# EAGLE board variable (EAGLE 6.5.0)
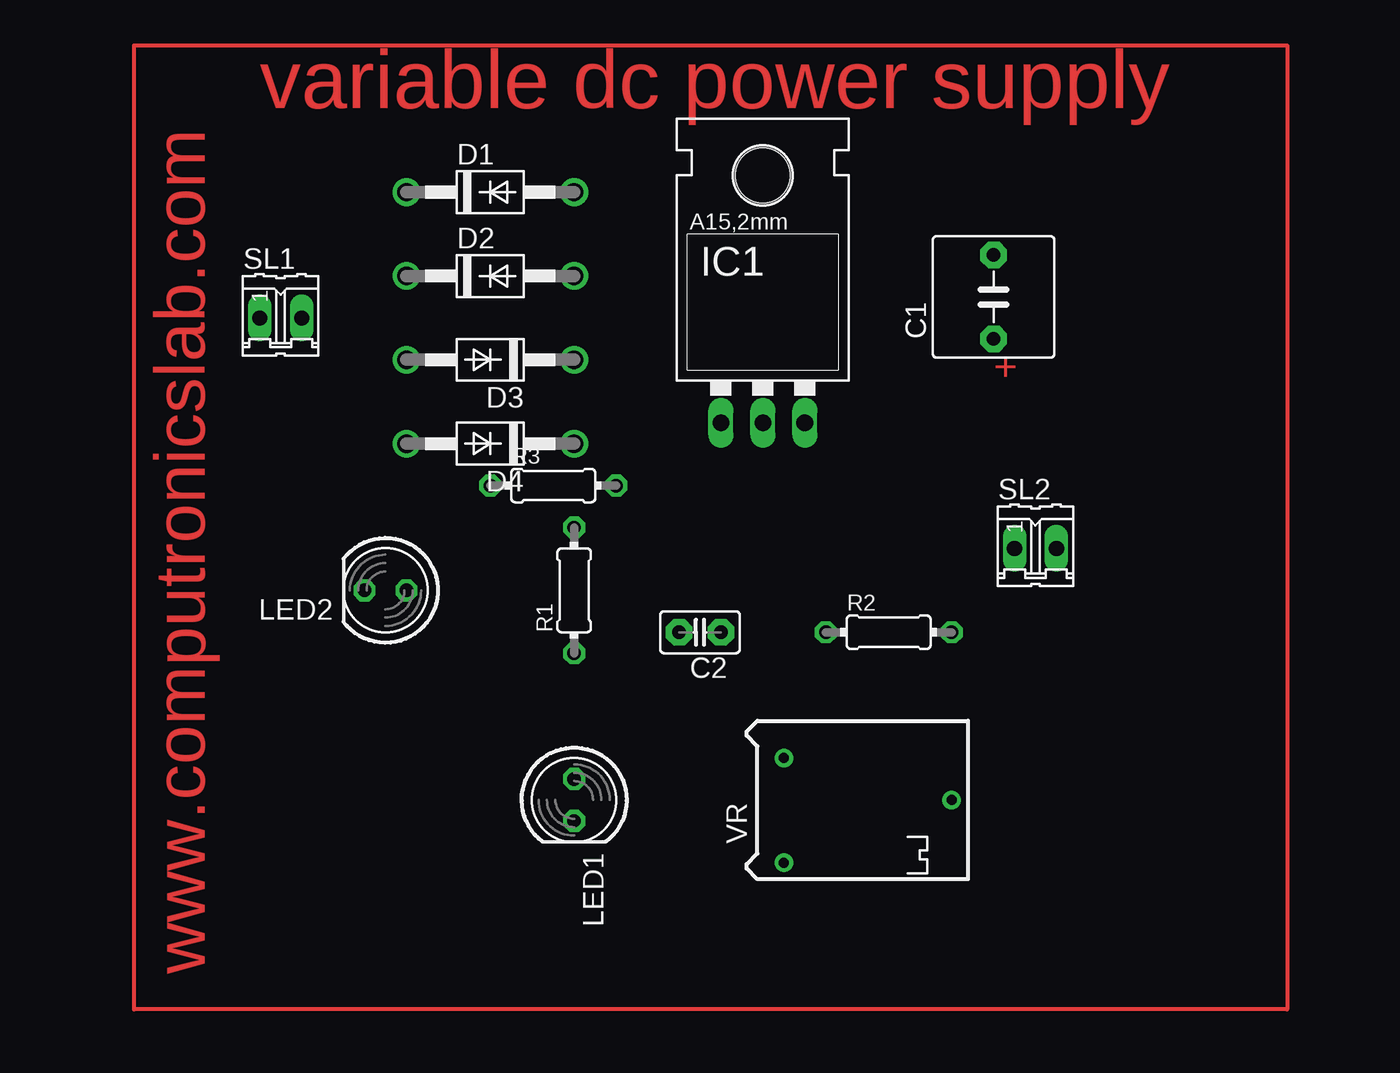
[diagram p0: board, top side]
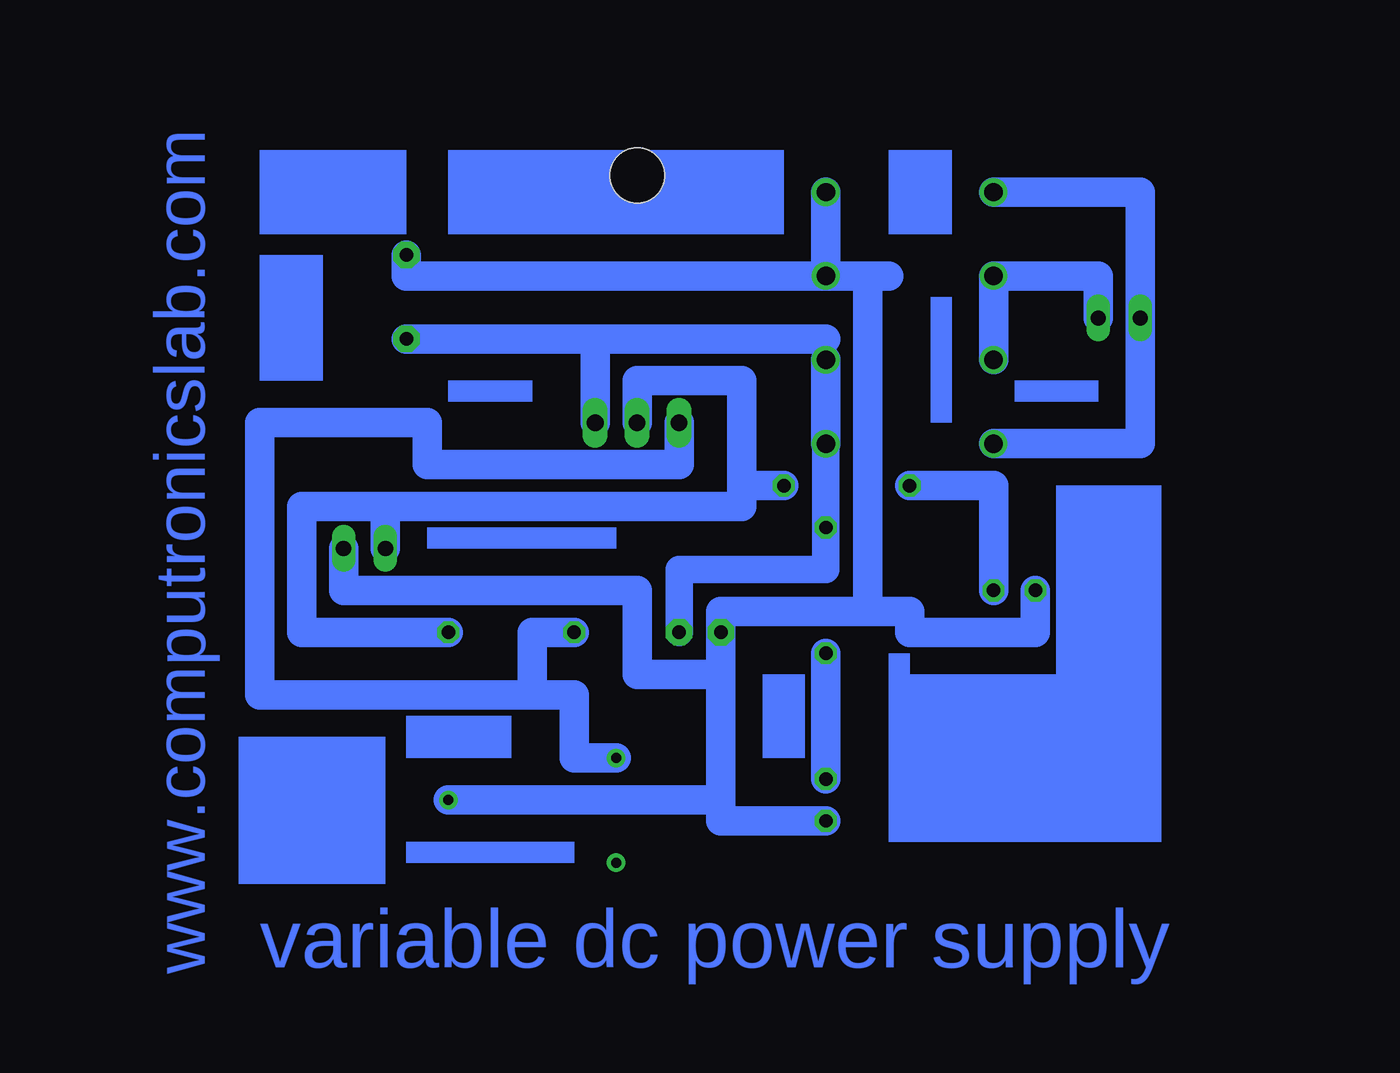
[diagram p1: board, bottom side, seen from below]

No outline drawn. Coordinates in mm, seen from the top.
Copper layers (1*16): Top 0.035mm / dielectric 1.5mm / Bottom 0.035mm
Design rules "default": minimum track width 10mil, minimum drill 24mil, track to track 8mil, track to pad 8mil, pad to pad 8mil, via to via 8mil, smd to smd 8mil, copper to edge 40mil, drill to drill 8mil, minimum pad ring 10mil, minimum via ring 8mil, stop-mask expansion 4mil, vias tented up to drill 0mil, thermal gap 10mil

## Footprints (pad centres in the part's own frame; a part is rotated, then mirrored left to right if it is on the bottom)
C5B7.2 = drill 0.813 pad 1.6 octagon: 1 -2.54,0; 2 2.54,0
C2.5-2 = drill 0.813 pad 1.6 octagon: 1 -1.27,0; 2 1.27,0
DO41-10 = drill 1.118: A 5.08,0; C -5.08,0
317TL = drill 1.016 long: 1 -2.54,-3.81; 2 0,-3.81; 3 2.54,-3.81 | hole 3.302: 0,11.176
LED5MM = drill 0.813 octagon: A -1.27,0; K 1.27,0
0204/7 = drill 0.813 octagon: 1 -3.81,0; 2 3.81,0
02P = drill 0.914 long: 1 -1.27,0; 2 1.27,0
RTRIM64P = drill 0.61: 1 -2.54,-3.81; 2 7.62,0; 3 -2.54,2.54

## Placement (x,y rotation side)
C1  2200uf  [C5B7.2]  48.26,50.8 90 top
C2  0.1uf  [C2.5-2]  30.48,30.48 180 top
D1  1N4007  [DO41-10]  17.78,57.15 0 top
D2  1N4007  [DO41-10]  17.78,52.07 0 top
D3  1N4007  [DO41-10]  17.78,46.99 180 top
D4  1N4007  [DO41-10]  17.78,41.91 180 top
IC1  LM317  [317TL]  34.29,46.99 0 top
LED1  5mm  [LED5MM]  22.86,20.32 270 top
LED2  5mm  [LED5MM]  11.43,33.02 180 top
R1  1K  [0204/7]  22.86,33.02 90 top
R2  180E  [0204/7]  41.91,30.48 0 top
R3  220E  [0204/7]  21.59,39.37 0 top
SL1  transformer  [02P]  5.08,49.53 0 top
SL2  output  [02P]  50.8,35.56 0 top
VR  4.7K  [RTRIM64P]  38.1,20.32 0 top

## Library data of the parts
C1 C2 = capacitor-wima
D1-D4 = diode
IC1 = v-reg
LED1 LED2 = led
R1-R3 = eagle-ltspice; SPICEMODEL: NONE; SPICEPREFIX: R
SL1 SL2 = con-amp-quick; OC_FARNELL: unknown; OC_NEWARK: unknown
VR = resistor

## Nets
N$1: LED1.A R1.1
N$2: D1.C D4.A SL1.1
N$3: D2.C D3.A SL1.2
N$4: C1.1 C2.1 D3.C D4.C IC1.3 R1.2
N$6: IC1.1 R2.1 VR.3
N$7: LED2.A R3.1
N$9: IC1.2 R2.2 R3.2 SL2.1
N$10: C1.2 C2.2 D1.A D2.A LED1.K LED2.K SL2.2 VR.2

## Tracks (layer width: path | path; a pad name or v marks a point on that pad's centre or on a via)
N$1
  Bottom 1.778: R1.1 LED1.A
N$2
  Bottom 1.778: D1.C 3.81,57.15 SL1.1 3.81,41.91 D4.A
N$3
  Bottom 1.778: SL1.2 6.35,52.07 D2.C D3.A
N$4
  Bottom 0.254: D3.C 22.86,48.26
  Bottom 1.676: D4.C R1.2 22.86,34.29 31.75,34.29 C2.1
  Bottom 1.778: C1.1 36.83,48.26 | D4.C D3.C | 36.83,48.26 IC1.3 | 22.86,48.26 36.83,48.26
N$5
  Top 0.254: -3.81,66.04 66.04,66.04 66.04,7.62 -3.81,7.62 -3.81,66.04
N$6
  Bottom 1.778: VR.3 38.1,22.86 38.1,26.67 40.64,26.67 | R2.1 40.64,30.48 40.64,26.67 | IC1.1 31.75,40.64 46.99,40.64 46.99,43.18 57.15,43.18 57.15,26.67 40.64,26.67
N$7
  Bottom 1.778: LED2.A 12.7,39.37 R3.1
N$9
  Bottom 1.778: R2.2 54.61,30.48 54.61,38.1 49.53,38.1 | SL2.1 49.53,38.1 | IC1.2 34.29,45.72 27.94,45.72 27.94,39.37 | 27.94,39.37 27.94,38.1 49.53,38.1 | 27.94,39.37 R3.2
N$10
  Bottom 1.778: C1.2 48.26,52.07 D2.A | D2.A D1.A | VR.2 29.21,20.32 | SL2.2 52.07,33.02 34.29,33.02 34.29,27.94 29.21,27.94 | LED1.K 29.21,19.05 29.21,20.32 | 29.21,20.32 29.21,27.94 | 29.21,27.94 C2.2 29.21,31.75 20.32,31.75 | 20.32,52.07 D2.A | 20.32,31.75 19.05,31.75 17.78,31.75 17.78,30.48 10.16,30.48 LED2.K | 20.32,31.75 20.32,52.07 | 20.32,52.07 19.05,52.07
(copper drawn outside any net)
  shapes: Bottom area x18

## Text on the board
Top: variable dc power supply | www.computronicslab.com | +
Bottom: www.computronicslab.com | variable dc power supply